# Altium PCB PCBnew.PcbDoc (part 1 of 2)
Units mil, origin at the board's own origin, x right, y up, seen from the top; angles counter-clockwise.
Board outline 9000 x 6005 mil, 4 copper layers (Top Layer, Power, Ground, Bottom Layer); 90 components, 127 nets, 639 pads, 900 vias.
Unrouted connection lines stored in the file: 161.
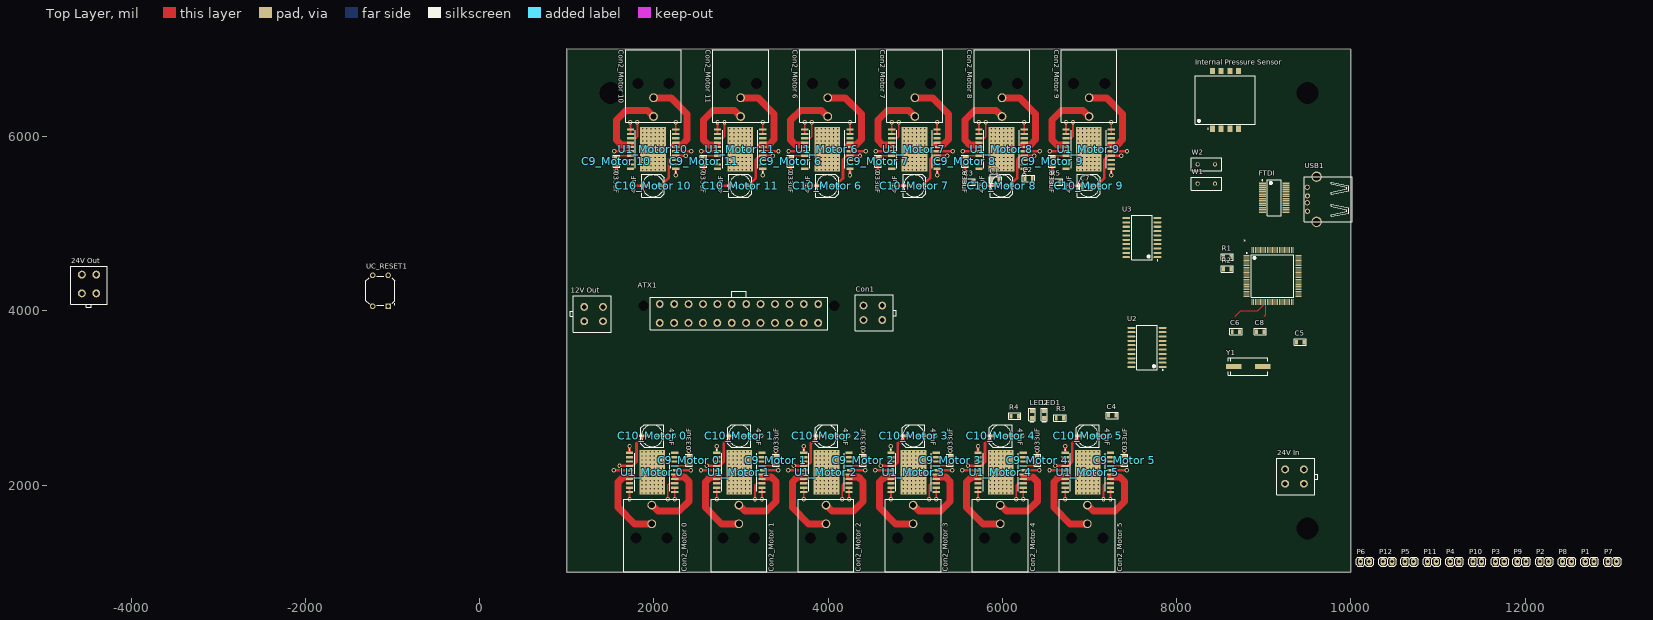
[diagram p0: Top Layer view]
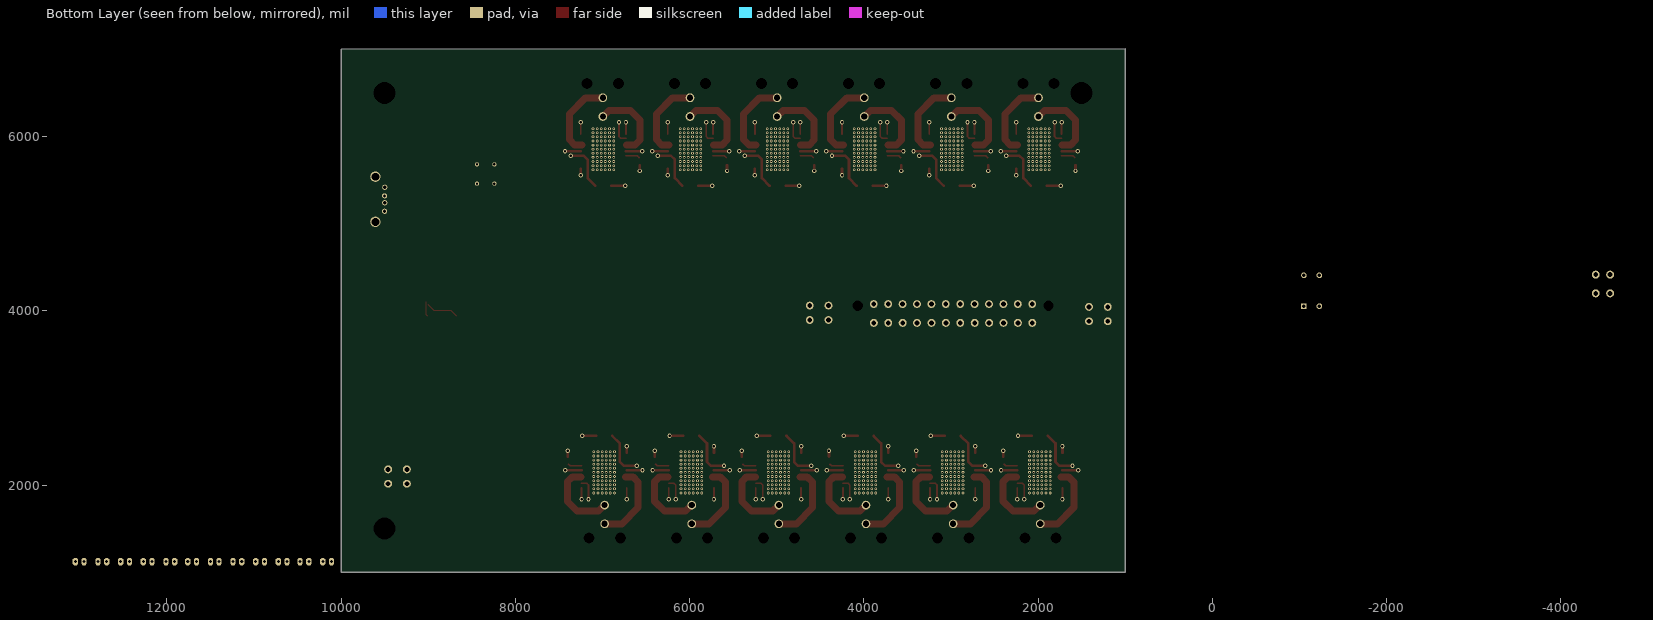
[diagram p1: Bottom Layer view, seen from below]
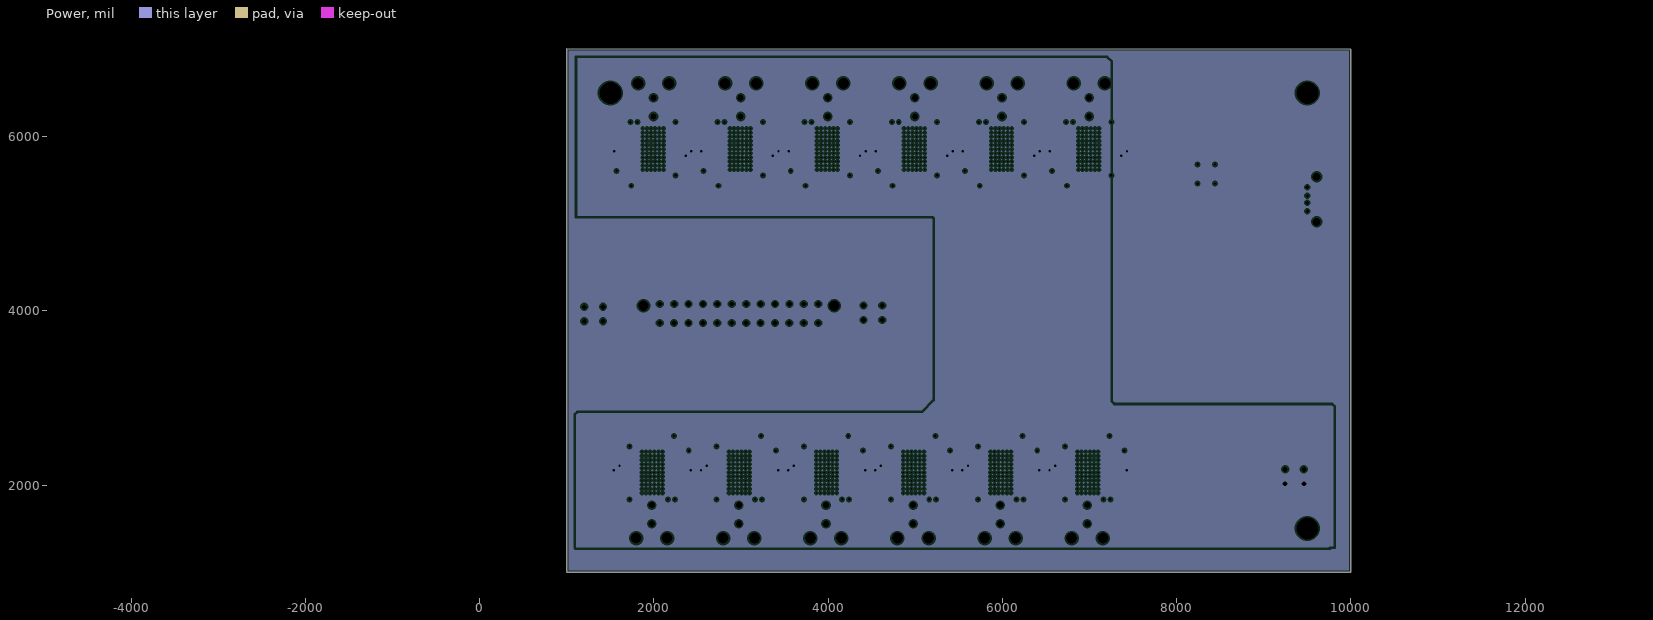
[diagram p2: Power, clearances drawn from the general rule]
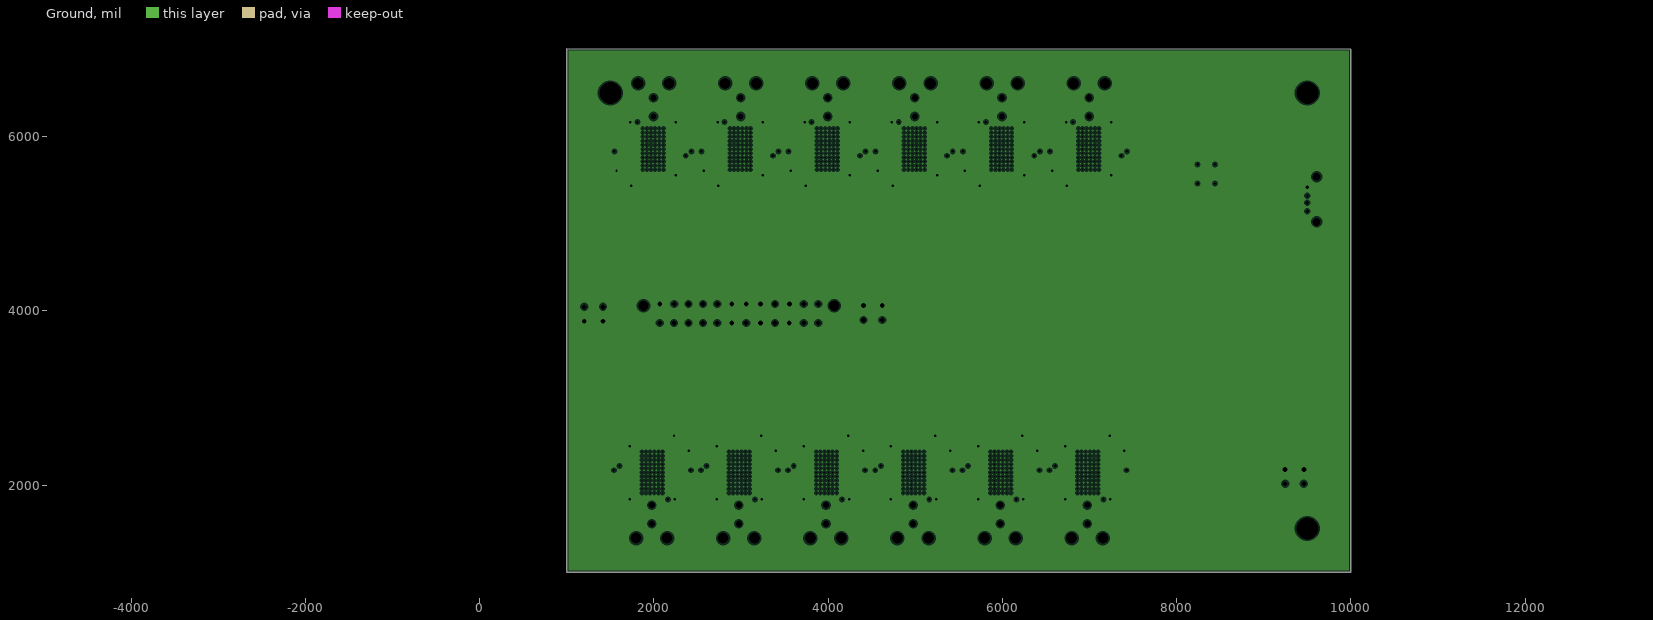
[diagram p3: Ground, clearances drawn from the general rule]

## Layer stack, top to bottom
Top Layer: signal copper 1.4
Dielectric: core 12.6, FR-4, Dk 4.8
Power: plane copper 1.4, net +24V
Dielectric: prepreg 12.6, FR-4, Dk 4.8
Ground: plane copper 1.4, net GND
Dielectric: core 12.6, FR-4, Dk 4.8
Bottom Layer: signal copper 1.4

## Board outline
1000,1000 10000,1000 10000,7000 1000,7005

## Design rules (kind name [scope] priority, off if disabled: settings)
Clearance [All] p1: gap=6
MinimumAnnularRing [All] p1: minimumring=7.5
MinimumSolderMaskSliver [All] p1: minsoldermaskwidth=6
PlaneClearance [All] p1: clearance=20
PlaneConnect [All] p1: planeconnectstyle=Relief reliefexpansion=20 reliefentries=4 reliefconductorwidth=10 reliefairgap=10
PolygonConnect [All] p1: connectstyle=Relief reliefconductorwidth=10 reliefentries=4 polygonreliefangle="90 Angle"
RoomDefinition "Motor 8" [InComponentClass('Motor 8')] p1: confinementstyle=ConfineIn formatcopy=TRUE lockcomponents=FALSE outline 5500,5270 6470,5270 6470,7000 5500,7000
RoomDefinition "Voltage Regulation" [InComponentClass('Voltage Regulation')] p2: confinementstyle=ConfineIn formatcopy=TRUE lockcomponents=FALSE outline 984,2870 10186,2870 10186,7045 984,7045
RoomDefinition "Top Level Schematic" [InComponentClass('Top Level Schematic')] p3: confinementstyle=ConfineIn formatcopy=TRUE lockcomponents=FALSE outline 9695,1380 9920,1380 9920,2535 9695,2535
RoomDefinition "Motor 11" [InComponentClass('Motor 11')] p4: confinementstyle=ConfineIn formatcopy=TRUE lockcomponents=FALSE outline 2500,5270 3470,5270 3470,7000 2500,7000
RoomDefinition "Motor 10" [InComponentClass('Motor 10')] p5: confinementstyle=ConfineIn formatcopy=TRUE lockcomponents=FALSE outline 1500,5270 2470,5270 2470,7000 1500,7000
RoomDefinition "Motor 9" [InComponentClass('Motor 9')] p6: confinementstyle=ConfineIn formatcopy=TRUE lockcomponents=FALSE outline 6500,5270 7470,5270 7470,7000 6500,7000
RoomDefinition "Motor 7" [InComponentClass('Motor 7')] p7: confinementstyle=ConfineIn formatcopy=TRUE lockcomponents=FALSE outline 4500,5270 5470,5270 5470,7000 4500,7000
RoomDefinition "Motor 6" [InComponentClass('Motor 6')] p8: confinementstyle=ConfineIn formatcopy=TRUE lockcomponents=FALSE outline 3500,5270 4470,5270 4470,7000 3500,7000
RoomDefinition "Motor 5" [InComponentClass('Motor 5')] p9: confinementstyle=ConfineIn formatcopy=TRUE lockcomponents=FALSE outline 7470,2730 6500,2730 6500,1000 7470,1000
RoomDefinition "Motor 4" [InComponentClass('Motor 4')] p10: confinementstyle=ConfineIn formatcopy=TRUE lockcomponents=FALSE outline 6470,2730 5500,2730 5500,1000 6470,1000
RoomDefinition "Motor 3" [InComponentClass('Motor 3')] p11: confinementstyle=ConfineIn formatcopy=TRUE lockcomponents=FALSE outline 5470,2730 4500,2730 4500,1000 5470,1000
RoomDefinition "Motor 2" [InComponentClass('Motor 2')] p12: confinementstyle=ConfineIn formatcopy=TRUE lockcomponents=FALSE outline 4470,2730 3500,2730 3500,1000 4470,1000
RoomDefinition "Motor 1" [InComponentClass('Motor 1')] p13: confinementstyle=ConfineIn formatcopy=TRUE lockcomponents=FALSE outline 3470,2730 2500,2730 2500,1000 3470,1000
RoomDefinition "Motor 0" [InComponentClass('Motor 0')] p14: confinementstyle=ConfineIn formatcopy=TRUE lockcomponents=FALSE outline 2470,2730 1500,2730 1500,1000 2470,1000
RoomDefinition Microcontroller [InComponentClass('Microcontroller')] p15: confinementstyle=ConfineIn formatcopy=TRUE lockcomponents=FALSE outline 883,2920 10164,2920 10164,7167 883,7167
RoutingVias [All] p1: holewidth=28 width=50 viastyle="Through Hole" minholewidth=15 minwidth=30 maxholewidth=30 maxwidth=50
SilkscreenOverComponentPads [All] p1: minsilkscreentomaskgap=10
SolderMaskExpansion [All] p1: expansion=4
TestPointUsage [All] p1: valid=0 allowmultiple=FALSE
Testpoint [All] p1: side=15 testpointundercomponent=TRUE minsize=40 maxsize=100 preferedsize=60 minholesize=0 maxholesize=40 preferedholesize=32 testpointgrid=1 style=1023 order=0-112345678
Width [All] p1: maxlimit=1000 minlimit=6 preferedwidth=10
20 further rules are at their usual default settings.

## Classes and differential pairs
component class "Motor 2": "C9_Motor 2" "C10_Motor 2" "Con2_Motor 2" "U1_Motor 2"
component class "Motor 1": "C9_Motor 1" "C10_Motor 1" "Con2_Motor 1" "U1_Motor 1"
component class "Motor 0": "C9_Motor 0" "C10_Motor 0" "Con2_Motor 0" "U1_Motor 0"
component class Microcontroller: * C1 C2 C3 C4 C5 C6 C7 C8 Con1 FTDI "Internal Pressure Sensor" LED1 LED2 R1 R2 R3 R4 R5 U2 U3 UC_RESET1 USB1 Y1
component class "Motor 3": "C9_Motor 3" "C10_Motor 3" "Con2_Motor 3" "U1_Motor 3"
component class "Motor 4": "C9_Motor 4" "C10_Motor 4" "Con2_Motor 4" "U1_Motor 4"
component class "Motor 5": "C9_Motor 5" "C10_Motor 5" "Con2_Motor 5" "U1_Motor 5"
component class "Motor 6": "C9_Motor 6" "C10_Motor 6" "Con2_Motor 6" "U1_Motor 6"
component class "Motor 7": "C9_Motor 7" "C10_Motor 7" "Con2_Motor 7" "U1_Motor 7"
component class "Motor 8": "C9_Motor 8" "C10_Motor 8" "Con2_Motor 8" "U1_Motor 8"
component class "Motor 9": "C9_Motor 9" "C10_Motor 9" "Con2_Motor 9" "U1_Motor 9"
component class "Motor 10": "C9_Motor 10" "C10_Motor 10" "Con2_Motor 10" "U1_Motor 10"
component class "Motor 11": "C9_Motor 11" "C10_Motor 11" "Con2_Motor 11" "U1_Motor 11"
component class "Top Level Schematic": W1 W2
component class "Voltage Regulation": "12V Out" "24V In" "24V Out" ATX1 P1 P2 P3 P4 P5 P6 P7 P8 P9 P10 P11 P12
net class DIR[11..0]: DIR0 DIR1 DIR2 DIR3 DIR4 DIR5 DIR6 DIR7 DIR8 DIR9 DIR10 DIR11 DIR12
net class PWM[11..0]: PWM0 PWM1 PWM2 PWM3 PWM4 PWM5 PWM6 PWM7 PWM8 PWM9 PWM10 PWM11
channel class "Motor Controllers": "Motor 0" "Motor 1" "Motor 2" "Motor 3" "Motor 4" "Motor 5" "Motor 6" "Motor 7" "Motor 8" "Motor 9" "Motor 10" "Motor 11"

## Components (designator, comment, footprint, x,y, rotation, side; value= is the part's Value field where it differs from the comment)
"12V Out" "5566-4" 5566-4 1200,3960 r270 top
"24V In" "5566-4" 5566-4 9460,2100 r90 top
"24V Out" "5566-4" 5566-4 -4481,4200 r0 top
* "Component_1" TSQFP50P1600X1600X120-100N 9100,4400 r0 top
ATX1 "39-29-9244" "24-POS 5566" 1960,3780 r0 top
C1 "Cap" "0805 (2012) Capacitor" 5920,5500 r0 top
C2 "Cap" "0805 (2012) Capacitor" 6300,5520 r0 top
C3 "Cap" "0805 (2012) Capacitor" 5620,5480 r0 top
C4 "100nF" "0805 (2012) Capacitor" 7260,2800 r0 top
C5 "100nF" "0805 (2012) Capacitor" 9420,3640 r180 top
C6 "Cap" "0805 (2012) Capacitor" 8680,3760 r180 top
C7 "Cap" "0805 (2012) Capacitor" 6960,5420 r0 top
C8 "Cap" "0805 (2012) Capacitor" 8960,3760 r180 top
"C9_Motor 0" ".033uF" "0805 (2012) Capacitor" 2400,2285 r270 top (schematic designator C9)
"C9_Motor 1" ".033uF" "0805 (2012) Capacitor" 3400,2285 r270 top (schematic designator C9)
"C9_Motor 2" ".033uF" "0805 (2012) Capacitor" 4400,2285 r270 top (schematic designator C9)
"C9_Motor 3" ".033uF" "0805 (2012) Capacitor" 5400,2285 r270 top (schematic designator C9)
"C9_Motor 4" ".033uF" "0805 (2012) Capacitor" 6400,2285 r270 top (schematic designator C9)
"C9_Motor 5" ".033uF" "0805 (2012) Capacitor" 7400,2285 r270 top (schematic designator C9)
"C9_Motor 6" ".033uF" "0805 (2012) Capacitor" 3570,5715 r90 top (schematic designator C9)
"C9_Motor 7" ".033uF" "0805 (2012) Capacitor" 4570,5715 r90 top (schematic designator C9)
"C9_Motor 8" ".033uF" "0805 (2012) Capacitor" 5570,5715 r90 top (schematic designator C9)
"C9_Motor 9" ".033uF" "0805 (2012) Capacitor" 6570,5715 r90 top (schematic designator C9)
"C9_Motor 10" ".033uF" "0805 (2012) Capacitor" 1570,5715 r90 top (schematic designator C9)
"C9_Motor 11" ".033uF" "0805 (2012) Capacitor" 2570,5715 r90 top (schematic designator C9)
"C10_Motor 0" "47uF" Radial_6.3mmDia_SM_D 1980,2565 r180 top (schematic designator C10)
"C10_Motor 1" "47uF" Radial_6.3mmDia_SM_D 2980,2565 r180 top (schematic designator C10)
"C10_Motor 2" "47uF" Radial_6.3mmDia_SM_D 3980,2565 r180 top (schematic designator C10)
"C10_Motor 3" "47uF" Radial_6.3mmDia_SM_D 4980,2565 r180 top (schematic designator C10)
"C10_Motor 4" "47uF" Radial_6.3mmDia_SM_D 5980,2565 r180 top (schematic designator C10)
"C10_Motor 5" "47uF" Radial_6.3mmDia_SM_D 6980,2565 r180 top (schematic designator C10)
"C10_Motor 6" "47uF" Radial_6.3mmDia_SM_D 3990,5435 r0 top (schematic designator C10)
"C10_Motor 7" "47uF" Radial_6.3mmDia_SM_D 4990,5435 r0 top (schematic designator C10)
"C10_Motor 8" "47uF" Radial_6.3mmDia_SM_D 5990,5435 r0 top (schematic designator C10)
"C10_Motor 9" "47uF" Radial_6.3mmDia_SM_D 6990,5435 r0 top (schematic designator C10)
"C10_Motor 10" "47uF" Radial_6.3mmDia_SM_D 1990,5435 r0 top (schematic designator C10)
"C10_Motor 11" "47uF" Radial_6.3mmDia_SM_D 2990,5435 r0 top (schematic designator C10)
Con1 "5566-4" 5566-4 4620,3980 r90 top
"Con2_Motor 0" "5569 Mini-Fit Jr 2-Pos Right Angle" "5569 Mini-Fit Jr 2-Pos Right Angle w/ PCB Mounting Flange" 1975,1555 r0 top (schematic designator Con2)
"Con2_Motor 1" "5569 Mini-Fit Jr 2-Pos Right Angle" "5569 Mini-Fit Jr 2-Pos Right Angle w/ PCB Mounting Flange" 2975,1555 r0 top (schematic designator Con2)
"Con2_Motor 2" "5569 Mini-Fit Jr 2-Pos Right Angle" "5569 Mini-Fit Jr 2-Pos Right Angle w/ PCB Mounting Flange" 3975,1555 r0 top (schematic designator Con2)
"Con2_Motor 3" "5569 Mini-Fit Jr 2-Pos Right Angle" "5569 Mini-Fit Jr 2-Pos Right Angle w/ PCB Mounting Flange" 4975,1555 r0 top (schematic designator Con2)
"Con2_Motor 4" "5569 Mini-Fit Jr 2-Pos Right Angle" "5569 Mini-Fit Jr 2-Pos Right Angle w/ PCB Mounting Flange" 5975,1555 r0 top (schematic designator Con2)
"Con2_Motor 5" "5569 Mini-Fit Jr 2-Pos Right Angle" "5569 Mini-Fit Jr 2-Pos Right Angle w/ PCB Mounting Flange" 6975,1555 r0 top (schematic designator Con2)
"Con2_Motor 6" "5569 Mini-Fit Jr 2-Pos Right Angle" "5569 Mini-Fit Jr 2-Pos Right Angle w/ PCB Mounting Flange" 3995,6445 r180 top (schematic designator Con2)
"Con2_Motor 7" "5569 Mini-Fit Jr 2-Pos Right Angle" "5569 Mini-Fit Jr 2-Pos Right Angle w/ PCB Mounting Flange" 4995,6445 r180 top (schematic designator Con2)
"Con2_Motor 8" "5569 Mini-Fit Jr 2-Pos Right Angle" "5569 Mini-Fit Jr 2-Pos Right Angle w/ PCB Mounting Flange" 5995,6445 r180 top (schematic designator Con2)
"Con2_Motor 9" "5569 Mini-Fit Jr 2-Pos Right Angle" "5569 Mini-Fit Jr 2-Pos Right Angle w/ PCB Mounting Flange" 6995,6445 r180 top (schematic designator Con2)
"Con2_Motor 10" "5569 Mini-Fit Jr 2-Pos Right Angle" "5569 Mini-Fit Jr 2-Pos Right Angle w/ PCB Mounting Flange" 1995,6445 r180 top (schematic designator Con2)
"Con2_Motor 11" "5569 Mini-Fit Jr 2-Pos Right Angle" "5569 Mini-Fit Jr 2-Pos Right Angle w/ PCB Mounting Flange" 2995,6445 r180 top (schematic designator Con2)
FTDI "FT232RL" SOP65P780X200-28N 9120,5300 r0 top
"Internal Pressure Sensor" "Component_1" SOP254P1740X1413-8N 8560,6420 r90 top
LED1 "LED" "LED 0805" 6480,2810 r90 top
LED2 "LED" "LED 0805" 6340,2810 r90 top
P1 "Header 2" "Male 2X1" 12690,1120 r0 top
P2 "Header 2" "Male 2X1" 12170,1120 r0 top
P3 "Header 2" "Male 2X1" 11660,1120 r0 top
P4 "Header 2" "Male 2X1" 11140,1120 r0 top
P5 "Header 2" "Male 2X1" 10620,1120 r0 top
P6 "Header 2" "Male 2X1" 10110,1120 r0 top
P7 "Header 2" "Male 2X1" 12950,1120 r0 top
P8 "Header 2" "Male 2X1" 12430,1120 r0 top
P9 "Header 2" "Male 2X1" 11910,1120 r0 top
P10 "Header 2" "Male 2X1" 11400,1120 r0 top
P11 "Header 2" "Male 2X1" 10880,1120 r0 top
P12 "Header 2" "Male 2X1" 10370,1120 r0 top
R1 "1KOhm" "R 0805 (2012) RESISTOR" 8580,4620 r180 top
R2 "1KOhm" "R 0805 (2012) RESISTOR" 8580,4480 r0 top
R3 "1KOhm" "R 0805 (2012) RESISTOR" 6660,2770 r0 top
R4 "1KOhm" "R 0805 (2012) RESISTOR" 6140,2790 r0 top
R5 "10kOhm" "R 0805 (2012) RESISTOR" 6620,5480 r0 top
"U1_Motor 0" "MC33886VW" SOP127P1420X340_HS-20N 1980,2145 r0 top (schematic designator U1)
"U1_Motor 1" "MC33886VW" SOP127P1420X340_HS-20N 2980,2145 r0 top (schematic designator U1)
"U1_Motor 2" "MC33886VW" SOP127P1420X340_HS-20N 3980,2145 r0 top (schematic designator U1)
"U1_Motor 3" "MC33886VW" SOP127P1420X340_HS-20N 4980,2145 r0 top (schematic designator U1)
"U1_Motor 4" "MC33886VW" SOP127P1420X340_HS-20N 5980,2145 r0 top (schematic designator U1)
"U1_Motor 5" "MC33886VW" SOP127P1420X340_HS-20N 6980,2145 r0 top (schematic designator U1)
"U1_Motor 6" "MC33886VW" SOP127P1420X340_HS-20N 3990,5855 r180 top (schematic designator U1)
"U1_Motor 7" "MC33886VW" SOP127P1420X340_HS-20N 4990,5855 r180 top (schematic designator U1)
"U1_Motor 8" "MC33886VW" SOP127P1420X340_HS-20N 5990,5855 r180 top (schematic designator U1)
"U1_Motor 9" "MC33886VW" SOP127P1420X340_HS-20N 6990,5855 r180 top (schematic designator U1)
"U1_Motor 10" "MC33886VW" SOP127P1420X340_HS-20N 1990,5855 r180 top (schematic designator U1)
"U1_Motor 11" "MC33886VW" SOP127P1420X340_HS-20N 2990,5855 r180 top (schematic designator U1)
U2 "SN74HCT540DW" DW020_N 7660,3580 r180 top
U3 "SN74HCT540DW" DW020_N 7600,4840 r180 top
UC_RESET1 "IT-2175" IT-2175 -1140,4230 r90 top
USB1 "87520" 87520-0010BLF 9500,5280 r90 top
W1 "Jumper" RAD-0.2 8340,5460 r180 top
W2 "Jumper" RAD-0.2 8340,5680 r0 top
Y1 "ECS-160-20-5P" CSM-7 8820,3360 r0 top

## Footprints (in the part's own frame and the unit in brackets; to place one, negate y for a bottom-side part, rotate by r counter-clockwise, add the part's x,y. Pads: shape width x height; smd on the part's side, far side on the other; paste and mask are expansions set on the pad)
"24-POS 5566" [mm]
  round 0 hole 3: 0(-2,7.09) 0(53.6,7.09)
  round 2.3 hole 1.4: 1(48.892,2.057) 2(44.692,2.057) 3(40.492,2.057) 4(36.292,2.057) 5(32.092,2.057) 6(27.892,2.057) 7(23.692,2.057) 8(19.492,2.057) 9(15.292,2.057) 10(11.092,2.057) 11(6.892,2.057) 12(2.692,2.057) 13(48.915,7.55) 14(44.715,7.55) 15(40.515,7.55) 16(36.315,7.55) 17(32.115,7.55) 18(27.915,7.55) 19(23.715,7.55) 20(19.515,7.55) 21(15.315,7.55) 22(11.115,7.55) 23(6.915,7.55) 24(2.715,7.55)
  silkscreen extent 0,0 51.64,11.35, body extent -2.97,-0.15 54.63,10.95, height 12.8
"0805 (2012) Capacitor" [mm] "0805 (2012) Capacitor"
  rect 0.85x1.4 smd: 1(-1.075,0) 2(1.075,0)
  silkscreen extent -1.78,-0.95 1.78,0.95, body extent -1.19,-0.65 1.19,0.65, height 0.85
5566-4 [mm]
  round 2.3 hole 1.4: 1(-2.159,0) 2(2.032,0) 3(2.032,5.461) 4(-2.159,5.461)
  silkscreen extent -5.33,-4.06 5.21,7.87, body extent -5.33,-3.25 5.07,7.75, height 12.8
"5569 Mini-Fit Jr 2-Pos Right Angle w/ PCB Mounting Flange" [mm] "4.20mm (.165\") Pitch Mini-Fit Jr.™ Header, Dual Row, Right Angle, with PCB Mounting Flange, 2 Circuits, PA Polyamide Nylon 6/6 94V-0, Tin (Sn) Plating"
  round 2.54 hole 1.8 unplated: 1(0,0) 2(0,5.461)
  round 0 hole 3.2 unplated: ""(-4.572,-4.191) ""(4.5,-4.2)
  silkscreen extent -8.13,-13.97 8.13,7.11, body extent -7.67,-13.95 7.73,5.95, height 11.4
87520-0010BLF [mm] "USB Type A Connector - PCB Mount Through Hole Right Angle"
  round 1.5 hole 0.92: 1(-3.5,0) 2(-1,0.025) 3(1,0) 4(3.5,0.05)
  round 3 hole 2.3: CASE(-6.575,-2.7) CASE(6.575,-2.7)
  silkscreen extent -6.55,-13.1 6.55,0.9, body extent -6.5,-13 6.5,1, height 7.7
CSM-7 [mm] "Quartz Crystal, SM; 2 Leads; Body 11.4 x 4.8 x 5 mm (LxWxH)"
  rect 4.5x1.5 smd: 1(-4.25,0) 2(4.25,0)
  silkscreen extent -5.75,-2.5 5.75,2.5
DW020_N [mm] "SOIC, 20-Leads, Body 12.8x7.5mm, Pitch 1.27mm, IPC Medium Density"
  oval 2.3x0.6 smd: 1(-4.55,5.715) 2(-4.55,4.445) 3(-4.55,3.175) 4(-4.55,1.905) 5(-4.55,0.635) 6(-4.55,-0.635) 7(-4.55,-1.905) 8(-4.55,-3.175) 9(-4.55,-4.445) 10(-4.55,-5.715) 11(4.55,-5.715) 12(4.55,-4.445) 13(4.55,-3.175) 14(4.55,-1.905) 15(4.55,-0.635) 16(4.55,0.635) 17(4.55,1.905) 18(4.55,3.175) 19(4.55,4.445) 20(4.55,5.715)
  silkscreen extent -4.67,-6.5 3,6.69, body extent -3.75,-6.5 3.75,6.5, height 2.65
IT-2175 [mm] "Switch, Push Button, Thru-Hole; 4 Leads; Body 8.5 x 8.5 mm (LxW typ); Row Spacing 9.0 mm; Pitch 4.5 mm"
  rect 1.65x1.65 hole 1: 1(-4.5,-2.25)
  round 1.65 hole 1: 2(4.5,-2.25) 3(-4.5,2.25) 4(4.5,2.25)
  silkscreen extent -4.25,-4.25 4.25,4.25
"LED 0805" [mm]
  rect 1.15x1.3 smd: 1(-1,0) 2(1,0)
  silkscreen extent -2.12,-0.9 1.83,0.9, body extent -1,-0.63 1,0.62, height 0.8
"Male 2X1" [mil]
  oct 60x85 hole 35: 1(0,0) 2(100,0)
  silkscreen extent -50,-50 150,50, body extent -50,-50 150,50, height 460
"R 0805 (2012) RESISTOR" [mm] "0805 (2012) Resistor"
  rect 0.85x1.4 smd: 1(-1.075,0) 2(1.075,0)
  silkscreen extent -1.78,-0.95 1.78,0.95, body extent -1.19,-0.65 1.19,0.65, height 0.85
RAD-0.2 [mm] "Jumper Wire; 2 Leads"
  round 1.2 hole 0.7: 1(-2.54,0) 2(2.54,0)
  silkscreen extent -4.44,-1.91 4.44,1.91
Radial_6.3mmDia_SM_D [mm] "Surface Mount Aluminum Electrolytic Capacitor"
  rect 2.9x0.65 smd: N(-2.35,0) P(2.35,0)
  silkscreen extent -3.3,-3.3 3.3,3.3, body extent -3.16,-3.16 3.16,3.16, height 5.8
SOP65P780X200-28N [mm] "SOP, 28-Leads, Body 10.5x5.6mm (max), Pitch 0.65mm, IPC Medium Density"
  rect 2.1x0.45 smd: 1(-3.45,4.225) 2(-3.45,3.575) 3(-3.45,2.925) 4(-3.45,2.275) 5(-3.45,1.625) 6(-3.45,0.975) 7(-3.45,0.325) 8(-3.45,-0.325) 9(-3.45,-0.975) 10(-3.45,-1.625) 11(-3.45,-2.275) 12(-3.45,-2.925) 13(-3.45,-3.575) 14(-3.45,-4.225) 15(3.45,-4.225) 16(3.45,-3.575) 17(3.45,-2.925) 18(3.45,-2.275) 19(3.45,-1.625) 20(3.45,-0.975) 21(3.45,-0.325) 22(3.45,0.325) 23(3.45,0.975) 24(3.45,1.625) 25(3.45,2.275) 26(3.45,2.925) 27(3.45,3.575) 28(3.45,4.225)
  silkscreen extent -3.57,-5.25 2,5.25, body extent -2.8,-5.25 2.8,5.25, height 2
SOP127P1420X340_HS-20N [mm] "SOP, 20-Leads, Body 11.1x7.5mm (max), Pitch 1.27mm, IPC Medium Density"
  rect 2.1x0.65 smd: 1(-6.6,5.715) 2(-6.6,4.445) 3(-6.6,3.175) 4(-6.6,1.905) 5(-6.6,0.635) 6(-6.6,-0.635) 7(-6.6,-1.905) 8(-6.6,-3.175) 9(-6.6,-4.445) 10(-6.6,-5.715) 11(6.6,-5.715) 12(6.6,-4.445) 13(6.6,-3.175) 14(6.6,-1.905) 15(6.6,-0.635) 16(6.6,0.635) 17(6.6,1.905) 18(6.6,3.175) 19(6.6,4.445) 20(6.6,5.715)
  rect 7.5x13 smd: 21(0,0)
  silkscreen extent -6.72,-5.55 5.15,6.71, body extent -3.75,-5.55 3.75,5.55, height 3.4
SOP254P1740X1413-8N [mm] "SOP, 8-Leads, Body 17.5x14.6mm (max), Pitch 2.54mm, IPC Medium Density"
  rect 1.8x1.5 smd: 1(-8.4,3.81) 2(-8.4,1.27) 3(-8.4,-1.27) 4(-8.4,-3.81) 5(8.4,-3.81) 6(8.4,-1.27) 7(8.4,1.27) 8(8.4,3.81)
  silkscreen extent -8.52,-8.75 7.1,8.75, body extent -7.27,-8.73 7.28,8.73, height 14.13
TSQFP50P1600X1600X120-100N [mm] "TSQFP, 100-Leads, Body 16.3x16.3mm (max), Pitch 0.50mm, IPC Medium Density"
  oval 1.8x0.3 smd: 1(-7.55,6) 2(-7.55,5.5) 3(-7.55,5) 4(-7.55,4.5) 5(-7.55,4) 6(-7.55,3.5) 7(-7.55,3) 8(-7.55,2.5) 9(-7.55,2) 10(-7.55,1.5) 11(-7.55,1) 12(-7.55,0.5) 13(-7.55,0) 14(-7.55,-0.5) 15(-7.55,-1) 16(-7.55,-1.5) 17(-7.55,-2) 18(-7.55,-2.5) 19(-7.55,-3) 20(-7.55,-3.5) 21(-7.55,-4) 22(-7.55,-4.5) 23(-7.55,-5) 24(-7.55,-5.5) 25(-7.55,-6) 51(7.55,-6) 52(7.55,-5.5) 53(7.55,-5) 54(7.55,-4.5) 55(7.55,-4) 56(7.55,-3.5) 57(7.55,-3) 58(7.55,-2.5) 59(7.55,-2) 60(7.55,-1.5) 61(7.55,-1) 62(7.55,-0.5) 63(7.55,0) 64(7.55,0.5) 65(7.55,1) 66(7.55,1.5) 67(7.55,2) 68(7.55,2.5) 69(7.55,3) 70(7.55,3.5) 71(7.55,4) 72(7.55,4.5) 73(7.55,5) 74(7.55,5.5) 75(7.55,6)
  oval 0.3x1.8 smd: 26(-6,-7.55) 27(-5.5,-7.55) 28(-5,-7.55) 29(-4.5,-7.55) 30(-4,-7.55) 31(-3.5,-7.55) 32(-3,-7.55) 33(-2.5,-7.55) 34(-2,-7.55) 35(-1.5,-7.55) 36(-1,-7.55) 37(-0.5,-7.55) 38(0,-7.55) 39(0.5,-7.55) 40(1,-7.55) 41(1.5,-7.55) 42(2,-7.55) 43(2.5,-7.55) 44(3,-7.55) 45(3.5,-7.55) 46(4,-7.55) 47(4.5,-7.55) 48(5,-7.55) 49(5.5,-7.55) 50(6,-7.55) 76(6,7.55) 77(5.5,7.55) 78(5,7.55) 79(4.5,7.55) 80(4,7.55) 81(3.5,7.55) 82(3,7.55) 83(2.5,7.55) 84(2,7.55) 85(1.5,7.55) 86(1,7.55) 87(0.5,7.55) 88(0,7.55) 89(-0.5,7.55) 90(-1,7.55) 91(-1.5,7.55) 92(-2,7.55) 93(-2.5,7.55) 94(-3,7.55) 95(-3.5,7.55) 96(-4,7.55) 97(-4.5,7.55) 98(-5,7.55) 99(-5.5,7.55) 100(-6,7.55)
  silkscreen extent -7.67,-6.25 6.25,6.82, body extent -7,-7 7,7, height 1.2

## Part data
"12V Out" "24V In" "24V Out" Con1: "4.20mm (.165\") Pitch Mini-Fit Jr.™ Header, Dual Row, Vertical, without Snap-in Plastic Peg PCB Lock, 4 Circuits, PA Polyamide Nylon 6/6 94V-2, Tin (Sn) Plating, without Drain Holes"
ATX1: "ATX 24 pin connector"
C1 C2 C3 C6 C7 C8: "Capacitor"
C4 C5 "C9_Motor 0" "C9_Motor 1" "C9_Motor 2" "C9_Motor 3" "C9_Motor 4" "C9_Motor 5" "C9_Motor 6" "C9_Motor 7" "C9_Motor 8" "C9_Motor 9" "C9_Motor 10" "C9_Motor 11": library part "Capacitor (non-polarized)", "Capacitor"
"C10_Motor 0" "C10_Motor 1" "C10_Motor 2" "C10_Motor 3" "C10_Motor 4" "C10_Motor 5" "C10_Motor 6" "C10_Motor 7" "C10_Motor 8" "C10_Motor 9" "C10_Motor 10" "C10_Motor 11": library part "Capacitor (polarized)", "Capacitor (polarized)"
FTDI: library part Component_1
LED1 LED2: "Standard LED"
P1 P2 P3 P4 P5 P6 P7 P8 P9 P10 P11 P12: "Header, 2-Pin"
R1 R2 R3 R4 R5: library part Resistor, "Resistor"
"U1_Motor 0" "U1_Motor 1" "U1_Motor 2" "U1_Motor 3" "U1_Motor 4" "U1_Motor 5" "U1_Motor 6" "U1_Motor 7" "U1_Motor 8" "U1_Motor 9" "U1_Motor 10" "U1_Motor 11": "Motor Controller"
U2 U3: "Octal Buffer and Line Driver with 3-State Outputs"
UC_RESET1: "Tactile Switch, DPST; Thru-Hole; Vertical; Rating DC 12V, 50mA (max)"
USB1: "87520 USB Through Hole Type A Right Angle Receptacle"
W1 W2: "Jumper Wire"
Y1: library part ECS-120-32-1, "Crystal Oscillator"

## Free pads (board coordinates)
  rect 0x0 hole 250: 0(9500,6500) 1(9500,1500) 3(1500,6500)

## Via types
v1: diameter 30, hole 15, Top Layer to Bottom Layer, tented top, 792 vias
v2: diameter 50, hole 28, Top Layer to Bottom Layer, 108 vias

## Nets (pads, with @x,y where several pads share a name; then routed paths per layer and width w, separated by ;. In a path a pad name is that pad's centre, name@x,y a point inside that pad or via, vN(x,y) a via of type N, cw(c..) or ccw(c..) an arc to the next point about the centre after c; other vN are vias at no path point)
+3.3V: ATX1.1 ATX1.2 ATX1.12 ATX1.13 P5.1 P5.2 P6.1 P6.2
+5V: "Internal Pressure Sensor.6" *.100 ATX1.4 ATX1.6 ATX1.21 ATX1.22 ATX1.23 C1.2 C2.2 C3.2 C5.1 Con1.1 FTDI.19 P3.1 P3.2 P4.1 P4.2 R3.2 R4.2 U2.20 U3.20 USB1.1
"+5V STDBY": ATX1.9
+12V: "12V Out.1" "12V Out.4" ATX1.10 ATX1.11 P1.1 P1.2 P2.1 P2.2
+24V: "24V In.1" "24V In.4" "24V Out.4" "C10_Motor 0.P" "C10_Motor 1.P" "C10_Motor 2.P" "C10_Motor 3.P" "C10_Motor 4.P" "C10_Motor 5.P" "C10_Motor 6.P" "C10_Motor 7.P" "C10_Motor 8.P" "C10_Motor 9.P" "C10_Motor 10.P" "C10_Motor 11.P" "U1_Motor 0.4" "U1_Motor 0.5" "U1_Motor 0.16" "U1_Motor 1.4" "U1_Motor 1.5" "U1_Motor 1.16" "U1_Motor 2.4" "U1_Motor 2.5" "U1_Motor 2.16" "U1_Motor 3.4" "U1_Motor 3.5" "U1_Motor 3.16" "U1_Motor 4.4" "U1_Motor 4.5" "U1_Motor 4.16" "U1_Motor 5.4" "U1_Motor 5.5" "U1_Motor 5.16" "U1_Motor 6.4" "U1_Motor 6.5" "U1_Motor 6.16" "U1_Motor 7.4" "U1_Motor 7.5" "U1_Motor 7.16" "U1_Motor 8.4" "U1_Motor 8.5" "U1_Motor 8.16" "U1_Motor 9.4" "U1_Motor 9.5" "U1_Motor 9.16" "U1_Motor 10.4" "U1_Motor 10.5" "U1_Motor 10.16" "U1_Motor 11.4" "U1_Motor 11.5" "U1_Motor 11.16" | length 10975.2
  Top Layer w30: v2(1540,2170) 1720.16,2170 ; v2(1545,5830) 1730.16,5830 ; v2(1605,2220) 1720.16,2220 1753.99,2220 1800,2266.01 1800,2477.52 1887.48,2565 ; 2082.52,5435 2170,5522.48 2170,5733.99 2216.01,5780 2249.84,5780 v2(2365,5780) ; 2239.84,2170 v2(2425,2170) ; 2249.84,5830 v2(2430,5830) ; v2(2540,2170) 2720.16,2170 ; v2(2545,5830) 2730.16,5830 ; v2(2605,2220) 2720.16,2220 2753.99,2220 2800,2266.01 2800,2477.52 2887.48,2565 ; 3082.52,5435 3170,5522.48 3170,5733.99 3216.01,5780 3249.84,5780 v2(3365,5780) ; 3239.84,2170 v2(3425,2170) ; 3249.84,5830 v2(3430,5830) ; v2(3540,2170) 3720.16,2170 ; v2(3545,5830) 3730.16,5830 ; v2(3605,2220) 3720.16,2220 3753.99,2220 3800,2266.01 3800,2477.52 3887.48,2565 ; 4082.52,5435 4170,5522.48 4170,5733.99 4216.01,5780 4249.84,5780 v2(4365,5780) ; 4239.84,2170 v2(4425,2170) ; 4249.84,5830 v2(4430,5830) ; v2(4540,2170) 4720.16,2170 ; v2(4545,5830) 4730.16,5830 ; v2(4605,2220) 4720.16,2220 4753.99,2220 4800,2266.01 4800,2477.52 4887.48,2565 ; 5082.52,5435 5170,5522.48 5170,5733.99 5216.01,5780 5249.84,5780 v2(5365,5780) ; 5239.84,2170 v2(5425,2170) ; 5249.84,5830 v2(5430,5830) ; v2(5540,2170) 5720.16,2170 ; v2(5545,5830) 5730.16,5830 ; v2(5605,2220) 5720.16,2220 5753.99,2220 5800,2266.01 5800,2477.52 5887.48,2565 ; 6082.52,5435 6170,5522.48 6170,5733.99 6216.01,5780 6249.84,5780 v2(6365,5780) ; 6239.84,2170 v2(6425,2170) ; 6249.84,5830 v2(6430,5830) ; v2(6540,2170) 6720.16,2170 ; v2(6545,5830) 6730.16,5830 ; v2(6605,2220) 6720.16,2220 6753.99,2220 6800,2266.01 6800,2477.52 6887.48,2565 ; 7082.52,5435 7170,5522.48 7170,5733.99 7216.01,5780 7249.84,5780 v2(7365,5780) ; 7239.84,2170 v2(7425,2170) ; 7249.84,5830 v2(7430,5830)
-5V: ATX1.20
-12V: ATX1.14
ADC0: *.97
ADC1: *.96
ADC2: *.95
ADC3: *.94
ADC4: *.93
ADC5: *.92
ADC6: *.91
ADC7: *.90
ADC8: *.89
ADC9: *.88
ADC10: *.87
ADC11: *.86
ADC12: *.85
ADC13: *.84
ADC14: *.83
ADC15: *.82
"CONTROLLER KILL": *.71 W2.1
DIR0: "U1_Motor 0.3" *.35 U2.7
DIR1: "U1_Motor 1.3" *.36 U2.6
DIR2: "U1_Motor 2.3" *.37 U2.5
DIR3: "U1_Motor 3.3" *.38 U2.4
DIR4: "U1_Motor 4.3" *.39 U2.3
DIR5: "U1_Motor 5.3" *.40 U2.2
DIR6: "U1_Motor 6.3" *.78 U3.6
DIR7: "U1_Motor 7.3" *.77 U3.7
DIR8: "U1_Motor 8.3" *.76 U3.8
DIR9: "U1_Motor 9.3" *.75 U3.9
DIR10: "U1_Motor 10.3" *.42 U3.4
DIR11: "U1_Motor 11.3" *.41 U3.5
DIR12: *.74
"DISABLE_Motor 0": "U1_Motor 0.18" "U1_Motor 1.18" "U1_Motor 2.18" "U1_Motor 3.18" "U1_Motor 4.18" "U1_Motor 5.18" "U1_Motor 6.18" "U1_Motor 7.18" "U1_Motor 8.18" "U1_Motor 9.18" "U1_Motor 10.18" "U1_Motor 11.18" W1.2 W2.2